# Altium PCB CSI2-TX2-XAVIER_Rev02.PcbDoc (part 2 of 2)
Units mm, origin at the board's own origin, x right, y up, seen from the top; angles counter-clockwise.
Board outline 75 x 25 mm, 4 copper layers (Layer1 Top, Layer2, Layer3, Layer4 Bottom), stack 1.62 mm thick; 77 components, 97 nets, 354 pads, 134 vias.
Unrouted connection lines stored in the file: 59.
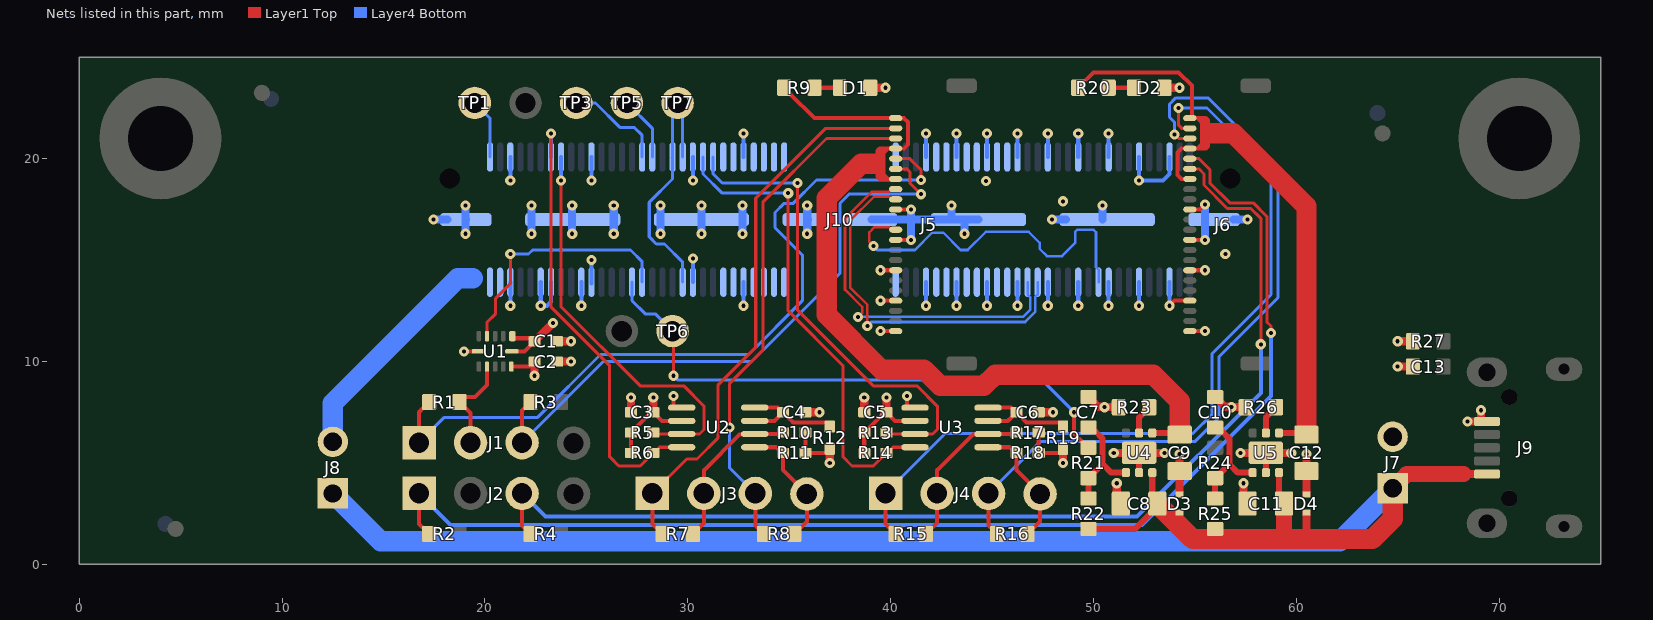
[diagram p4: the nets of this part, all layers, seen from the top]

## Via types
v1: diameter 0.5, hole 0.2, Layer1 Top to Layer4 Bottom, 134 vias

## Nets (pads, with @x,y where several pads share a name; then routed paths per layer and width w, separated by ;. In a path a pad name is that pad's centre, name@x,y a point inside that pad or via, vN(x,y) a via of type N, cw(c..) or ccw(c..) an arc to the next point about the centre after c; other vN are vias at no path point) (continued)
CSI3_D0_P: J5.12 J10.20 | length 18.4
  Layer1 Top w0.125: v1(39.15,15.7) 38.95,15.9 38.95,16.375 39.2,16.625 39.914,16.625 40.039,16.5 J5.12@40.25,16.5
  Layer4 Bottom w0.125: v1(39.15,15.7) 39.35,15.5 41.196,15.5 42.046,16.35 42.604,16.35 43.454,15.5 43.796,15.5 44.696,16.4 46.8,16.4 47.354,15.846 47.354,15.55 47.704,15.2 48.45,15.2 49.1,15.85 49.1,16.4 49.192,16.492 50.008,16.492 50.125,16.375 50.125,14.65 50.25,14.525 J10.20@50.25,13.914
CSI3_D1_N: J5.8 J10.34 | length 18.4
  Layer1 Top w0.125: v1(38.4,12.2) 38.6,12.4 38.6,12.696 37.75,13.546 37.75,17.054 39.071,18.375 39.914,18.375 40.039,18.5 J5.8@40.25,18.5
  Layer4 Bottom w0.125: v1(38.4,12.2) 46.525,12.2 46.875,12.55 46.875,13.178 46.75,13.303 J10.34@46.75,13.914
CSI3_D1_P: J5.9 J10.32 | length 18.4
  Layer1 Top w0.125: v1(38.85,11.75) 38.85,12.8 38,13.65 38,16.95 39.175,18.125 39.914,18.125 40.039,18 J5.9@40.25,18
  Layer4 Bottom w0.125: v1(38.85,11.75) 39.05,11.95 46.629,11.95 47.125,12.446 47.125,13.178 47.25,13.303 J10.32@47.25,13.914
CSI4_CLK_N: J10.45
CSI4_CLK_P: J10.43
CSI4_D0_N: J10.39
CSI4_D0_P: J10.37
CSI4_D1_N: J10.51
CSI4_D1_P: J10.49
CSI5_CLK_N: J10.67
CSI5_CLK_P: J10.65
CSI5_D0_N: J10.61
CSI5_D0_P: J10.59
CSI5_D1_N: J10.73
CSI5_D1_P: J10.71
CSI6_CLK_N: J10.46
CSI6_CLK_P: J10.44
CSI6_D0_N: J10.40
CSI6_D0_P: J10.38
CSI6_D1_N: J10.52
CSI6_D1_P: J10.50
CSI7_CLK_N: J10.68
CSI7_CLK_P: J10.66
CSI7_D0_N: J10.62
CSI7_D0_P: J10.60
CSI7_D1_N: J10.74
CSI7_D1_P: J10.72
EXT-GPIO0-I2C-SCL-A: J4.1 J6.2 R15.1 | length 40.4
  Layer1 Top w0.15: v1(54.2,22.5) 54.2,21.65 54.35,21.5 J6.2@54.75,21.5
  Layer1 Top w0.2: J4.1@39.75,3.5 39.75,2 39.95,1.8 40,1.8 40.25,1.55 R15.1@40.25,1.5
  Layer4 Bottom w0.15: J4.1@39.75,3.5 42.7,6.45 54.9,6.45 55.85,7.4 55.85,10.4 58.75,13.3 58.75,19.35 55.6,22.5 v1(54.2,22.5)
EXT-GPIO0-I2C-SCL-B: J3.1 J5.2 R7.1 | length 27.1
  Layer1 Top w0.15: J3.1@28.25,3.5 29.95,5.2 30.45,5.2 31.5,6.25 31.5,8.85 33.35,10.7 33.35,18.05 36.8,21.5 J5.2@40.25,21.5
  Layer1 Top w0.2: J3.1@28.25,3.5 28.25,2 R7.1@28.45,1.8
EXT-GPIO1-I2C-SDA-A: J4.3 J6.3 R16.1 | length 38
  Layer1 Top w0.15: v1(54,21.2) 54.2,21 J6.3@54.75,21
  Layer1 Top w0.2: J4.3@44.83,3.5 44.83,1.92 44.95,1.8 45,1.8 45.25,1.55 R16.1@45.25,1.5
  Layer4 Bottom w0.15: J4.3@44.83,3.5 47.38,6.05 55,6.05 56.2,7.25 56.2,10.25 59.1,13.15 59.1,19.55 55.65,23 54.062,23 53.75,22.688 53.75,22.05 54,21.8 v1(54,21.2)
EXT-GPIO1-I2C-SDA-B: J3.3 J5.3 R8.1 | length 25.7
  Layer1 Top w0.15: v1(32.05,6.75) 32.05,8.9 33.7,10.55 33.7,17.861 36.839,21 J5.3@40.25,21 J5.3@40.3,21
  Layer1 Top w0.2: J3.3@33.33,3.5 33.33,1.92 33.45,1.8 33.5,1.8 33.75,1.55 R8.1@33.75,1.5
  Layer4 Bottom w0.15: v1(32.05,6.75) 32.05,4.78 J3.3@33.33,3.5
EXT-GPIO2-A: J2.1 J6.5 R2.1 | length 61.8
  Layer1 Top w0.15: J6.5@54.75,20 55.2,20 55.75,19.45 55.75,18.789 56.714,17.825 57.875,17.825 58.55,17.15 58.55,11.95 58.75,11.75 v1(58.75,11.4)
  Layer1 Top w0.2: J2.1@16.75,3.5 16.75,2 16.95,1.8 17,1.8 17.25,1.55 R2.1@17.25,1.5
  Layer4 Bottom w0.2: J2.1@16.75,3.5 18.3,1.95 52.4,1.95 58.75,8.3 v1(58.75,11.4)
EXT-GPIO2-B: J1.1 J5.5 R1.1 | length 38.8
  Layer1 Top w0.15: J5.5@40.25,20 40.95,20 41.5,19.45 v1(41.5,18.95)
  Layer1 Top w0.2: J1.1@16.75,6 16.75,7.5 16.95,7.7 17,7.7 17.25,7.95 R1.1@17.25,8
  Layer4 Bottom w0.15: J1.1@16.75,6 18,7.25 22.6,7.25 25.7,10.35 33,10.35 35.65,13 35.65,15.25 34.3,16.6 34.3,17.35 34.75,17.8 35.2,17.8 36.35,18.95 v1(41.5,18.95)
EXT-GPIO3-A: J2.3 J6.6 R4.1 | length 55.1
  Layer1 Top w0.15: J6.6@54.75,19.5 55.2,19.5 55.45,19.25 55.45,18.7 56.6,17.55 57.761,17.55 58.25,17.061 v1(58.25,10.85)
  Layer1 Top w0.2: J2.3@21.83,3.5 21.83,1.92 21.95,1.8 22,1.8 22.25,1.55 R4.1@22.25,1.5
  Layer4 Bottom w0.2: J2.3@21.83,3.5 22.98,2.35 52.15,2.35 58.25,8.45 v1(58.25,10.85)
EXT-GPIO3-B: J1.3 J5.6 R3.1 | length 31.1
  Layer1 Top w0.15: J5.6@40.25,19.5 40.8,19.5 40.95,19.35 40.95,18.8 v1(41.5,18.25)
  Layer1 Top w0.2: J1.3@21.83,6 21.83,7.58 21.95,7.7 22,7.7 22.25,7.95 R3.1@22.25,8
  Layer4 Bottom w0.15: J1.3@21.83,6 25.83,10 33.15,10 37.5,14.35 37.5,17.8 37.95,18.25 v1(41.5,18.25)
GND: C1.2 C2.2 C3.2 C4.2 C5.2 C6.2 C7.2 C8.2 C9.2 C10.2 C11.2 C12.2 C13.1 D1.K D2.K D3.A D4.A J5.10 J5.13 J5.16 J5.19 J5.22 J6.10 J6.13 J6.16 J6.19 J6.22 J7.2 J9.5 J10.5 J10.6 J10.11 J10.12 J10.17 J10.18 J10.23 J10.24 J10.29 J10.30 J10.35 J10.36 J10.41 J10.42 J10.47 J10.48 J10.53 J10.54 J10.69 J10.70 J10.79 J10.80 J10.99 J10.100 J10.115 J10.116 J10.121 J10.122 J10.123 J10.124 J10.125 J10.126 J10.127 J10.128 R23.1 R26.1 R27.2 U1.6 U2.1 U3.1 U4.5 U4.7 U5.5 U5.7 | length 87.6
  Layer1 Top w0.2: v1(18.975,10.5) U1.6@19.675,10.5 ; U2.1@29.3,7.75 v1(29.3,8.3) ; v1(39.5,11.5) J5.22@40.25,11.5 ; v1(39.5,13) J5.19@40.25,13 ; v1(39.5,14.5) J5.16@40.25,14.5 ; J5.13@40.25,16 v1(41,16) ; J5.10@40.25,17.5 v1(41,17.5) ; U3.1@40.8,7.75 v1(40.8,8.3) ; v1(53.75,12.75) 54,13 J6.19@54.75,13 ; J6.22@54.75,11.5 v1(55.5,11.5) ; J6.16@54.75,14.5 v1(55.5,14.5) ; J6.13@54.75,16 v1(55.5,16) ; J6.10@54.75,17.5 55.25,17.5 v1(55.5,17.75)
  Layer1 Top w0.3: U4.5@52.25,4.525 U4.7@52.25,5.5 ; U5.5@58.5,4.525 U5.7@58.5,5.5
  Layer1 Top w0.4: C2.2@23.55,10 v1(24.25,10) ; C1.2@23.55,11 v1(24.25,11) ; C3.2@27.2,7.525 v1(27.2,8.225) ; C4.2@35.75,7.5 C4.2@35.8,7.5 v1(36.5,7.5) ; C5.2@38.7,7.5 C5.2@38.75,7.5 ; C5.2@38.7,7.525 v1(38.7,8.225) ; D1.K@39,23.5 v1(39.75,23.5) ; C6.2@47.25,7.5 C6.2@47.3,7.5 v1(48,7.5) ; C7.2@49.75,8.25 49.8,8.25 49.95,8.1 49.95,8.05 50.231,7.769 50.531,7.769 v1(50.55,7.75) R23.1@51.25,7.75 R23.1@51.3,7.75 ; v1(51,5.5) U4.7@51.75,5.5 ; C8.2@51.15,3.25 v1(51.15,4) ; U4.7@52.75,5.5 v1(53.5,5.5) ; D2.K@53.5,23.5 v1(54.25,23.5) ; D3.A@54.25,3.5 C9.2@54.25,4.6 ; C9.2@54.25,4.7 v1(54.25,5.45) ; C10.2@56,8.25 56.05,8.25 56.2,8.1 56.2,8.05 56.481,7.769 56.781,7.769 v1(56.8,7.75) R26.1@57.5,7.75 R26.1@57.55,7.75 ; v1(57.25,5.5) U5.7@58,5.5 ; C11.2@57.4,3.25 v1(57.4,4) ; U5.7@59,5.5 v1(59.75,5.5) ; D4.A@60.5,3.5 C12.2@60.5,4.6 ; C12.2@60.5,4.7 v1(60.5,5.45) ; v1(65,9.75) C13.1@65.75,9.75 ; v1(65,11) R27.2@65.75,11 ; v1(68.45,7.05) 69.1,7.05 v1(69.1,7.6)
  Layer4 Bottom w0.2: v1(21.25,12.75) J10.116@21.25,13.914 ; v1(21.25,18.922) J10.115@21.25,20.086 ; J10.100@25.25,13.85 v1(25.25,15.014) ; v1(25.25,18.922) J10.99@25.25,20.086 ; J10.80@30.25,13.914 v1(30.25,15.078) ; v1(30.25,18.922) J10.79@30.25,20.086 ; v1(32.75,12.75) J10.70@32.75,13.914 ; J10.69@32.75,20.086 v1(32.75,21.25) ; v1(41.75,12.75) J10.54@41.75,13.914 ; J10.53@41.75,20.086 v1(41.75,21.25) ; v1(43.25,12.75) J10.48@43.25,13.914 ; J10.47@43.25,20.086 v1(43.25,21.25) ; v1(44.75,12.75) J10.42@44.75,13.914 ; J10.41@44.75,20.086 v1(44.75,21.25) ; v1(46.25,12.75) J10.36@46.25,13.914 ; J10.35@46.25,20.086 v1(46.25,21.25) ; v1(47.75,12.75) J10.30@47.75,13.914 ; J10.29@47.75,20.086 v1(47.75,21.25) ; v1(49.25,12.75) J10.24@49.25,13.914 ; J10.23@49.25,20.086 v1(49.25,21.25) ; v1(50.75,12.75) J10.18@50.75,13.914 ; J10.17@50.75,20.086 v1(50.75,21.25) ; v1(52.25,12.75) J10.12@52.25,13.914 ; J10.11@52.25,20.086 v1(52.25,18.922) 53.422,18.922 53.75,19.25 J10.5@53.75,20.086 ; v1(53.75,12.75) J10.6@53.75,13.914
  Layer4 Bottom w0.4: v1(17.455,17) J10.128@18.155,17 ; v1(19.042,16.3) J10.128@19.042,17 ; v1(19.042,17.7) J10.128@19.042,17 ; J10.128@19.067,17 J10.128@19.042,17 ; v1(22.3,16.3) v1(22.3,17.7) ; v1(24.3,16.3) v1(24.3,17.7) ; v1(26.35,16.3) v1(26.35,17.7) ; v1(28.65,16.3) v1(28.65,17.7) ; v1(30.675,16.3) J10.126@30.675,17 v1(30.675,17.7) ; v1(32.7,16.3) v1(32.7,17.7) ; v1(35.887,16.3) J10.125@35.887,17 ; v1(35.887,17.7) J10.125@35.887,17 ; J10.125@35.912,17 J10.125@35.887,17 ; J10.124@39.055,17 41,17 ; v1(41,16) 41,17 ; v1(41,17.5) 41,17 ; J10.123@43,17 v1(43,17.7) ; v1(43.65,16.3) J10.123@43.65,17 ; J10.123@44.325,17 41,17 ; v1(47.95,17) J10.122@48.65,17 ; J10.122@50.45,17 v1(50.45,17.7) ; v1(55.5,16) v1(55.5,17.75) ; J10.121@56.9,17 v1(57.6,17)
  other v1: 56.5,15.3 48.5,17.9 44.7,18.9
GPIO15_CAM1_PWDN: J10.90 U1.4 | length 12.4
  Layer1 Top w0.15: U1.4@20.1,11.25 20.1,11.939 20.525,12.364 20.525,13.114 21.25,13.839 v1(21.25,15.3)
  Layer4 Bottom w0.15: v1(21.25,15.3) 22.15,15.3 22.35,15.5 27.175,15.5 27.75,14.925 J10.90@27.75,13.914
GPIO15_CAM1_PWDN_3V3: J1.2 R1.2 U1.8 | length 4.9
  Layer1 Top w0.2: J1.2@19.29,6 19.29,7.46 19.05,7.7 19,7.7 18.75,7.95 R1.2@18.75,8 19,8.25 19.5,8.25 20.1,8.85 U1.8@20.1,9.75
GPIO16_CAM1_RST: J10.92 R21.1 TP6.1 | length 28.3
  Layer1 Top w0.15: v1(29.3,9.3) TP6.1@29.3,11.5
  Layer1 Top w0.2: v1(49.05,7.5) 49.05,6.423 49.45,6.023 49.45,6 49.7,5.75 R21.1@49.75,5.75
  Layer4 Bottom w0.15: J10.92@27.25,13.914 27.25,13 27.9,12.35 28.4,12.35 TP6.1@29.25,11.5 ; v1(29.3,9.3) 29.5,9.1 47.45,9.1 v1(49.05,7.5)
GPIO25_VDD_SYS_EN: J10.119 TP1.1 | length 3
  Layer4 Bottom w0.15: TP1.1@19.5,22.75 20.25,22 20.25,21.35 J10.119@20.25,20.086
I2C_CAM_CLK: J4.2 R15.2 R17.1 U3.6 | length 8.1
  Layer1 Top w0.2: R15.2@41.75,1.5 41.75,1.55 42,1.8 42.05,1.8 42.29,2.04 J4.2@42.29,3.5 42.29,4.64 44.057,6.407 44.782,6.407 U3.6@44.8,6.425 46.125,6.425 R17.1@46.2,6.5
I2C_CAM_CLK_1V8: J10.75 R13.2 U3.3 | length 24.1
  Layer1 Top w0.15: v1(35.4,18.8) 35.4,12.55 39.15,8.8 41.3,8.8 42.3,7.8 42.3,6.65 42.075,6.425 U3.3@41.2,6.425 39.875,6.425 R13.2@39.8,6.5
  Layer4 Bottom w0.15: J10.75@31.25,20.086 31.25,19.25 31.7,18.8 v1(35.4,18.8)
I2C_CAM_DAT: J4.4 R16.2 R18.1 U3.5 | length 6.3
  Layer1 Top w0.2: U3.5@44.8,5.775 45.883,5.775 46,5.658 46,5.65 46.15,5.5 R18.1@46.2,5.5 46.2,4.645 J4.4@47.37,3.475 47.37,2.12 47.05,1.8 47,1.8 46.75,1.55 R16.2@46.75,1.5
I2C_CAM_DAT_1V8: J10.77 R14.2 U3.4 | length 23.7
  Layer1 Top w0.15: v1(34.95,18.3) 34.95,12.5 37.65,9.8 37.65,5.3 38.1,4.85 39.15,4.85 39.575,5.275 39.575,5.325 39.75,5.5 R14.2@39.8,5.5 39.85,5.5 40.025,5.675 40.025,5.687 40.113,5.775 U3.4@41.2,5.775
  Layer4 Bottom w0.15: J10.77@30.75,20.086 30.75,19.25 31.7,18.3 v1(34.95,18.3)
I2C_GP0_CLK: J3.2 R7.2 R10.1 U2.6 | length 7.9
  Layer1 Top w0.2: R7.2@30.25,1.5 30.25,1.55 30.5,1.8 30.55,1.8 30.79,2.04 J3.2@30.79,3.5 30.79,4.64 32.557,6.407 U2.6@33.282,6.407 ; U2.6@33.3,6.425 R10.1@34.625,6.425
I2C_GP0_CLK_1V8: J10.105 R5.2 U2.3 | length 20.1
  Layer1 Top w0.15: v1(23.75,18.922) 23.75,12.7 27.65,8.8 29.8,8.8 30.8,7.8 30.8,6.65 30.575,6.425 U2.3@29.7,6.425 R5.2@28.375,6.425
  Layer4 Bottom w0.2: v1(23.75,18.922) J10.105@23.75,20.086
I2C_GP0_DAT: J3.4 R8.2 R11.1 U2.5 | length 6.2
  Layer1 Top w0.2: U2.5@33.3,5.775 34.375,5.775 34.5,5.65 R11.1@34.65,5.5 ; R11.1@34.7,5.5 34.7,4.645 J3.4@35.87,3.475 35.87,2.12 35.55,1.8 35.5,1.8 35.25,1.55 R8.2@35.25,1.5
I2C_GP0_DAT_1V8: J10.107 R6.2 U2.4 | length 22.5
  Layer1 Top w0.15: v1(23.25,21.25) 23.25,12.7 26.15,9.8 26.15,5.3 26.6,4.85 27.65,4.85 28.075,5.275 28.075,5.325 28.25,5.5 R6.2@28.3,5.5 28.35,5.5 28.525,5.675 28.525,5.687 28.613,5.775 U2.4@29.7,5.775
  Layer4 Bottom w0.2: J10.107@23.25,20.086 v1(23.25,21.25)
I2C_PM_CLK_1V8: J10.87 TP5.1 | length 3.2
  Layer4 Bottom w0.15: TP5.1@27,22.75 28.25,21.5 J10.87@28.25,20.086
I2C_PM_DAT_1V8: J10.89 TP3.1 | length 5
  Layer4 Bottom w0.15: TP3.1@24.5,22.75 25.45,22.75 26.65,21.55 27.35,21.55 27.75,21.15 J10.89@27.75,20.086
NetC4_1: C4.1 R12.1 U2.7 U2.8 | length 5.7
  Layer1 Top w0.2: U2.7@33.3,7.075 34.275,7.075 34.5,7.3 34.5,7.35 C4.1@34.65,7.5 ; U2.8@33.3,7.725 34.425,7.725 C4.1@34.65,7.5 ; R12.1@37,6.8 37,6.85 36.85,7 35.2,7 34.9,7.3 34.9,7.35 34.75,7.5 C4.1@34.7,7.5 C4.1@34.65,7.5
NetC6_1: C6.1 R19.1 U3.7 U3.8 | length 5.7
  Layer1 Top w0.2: U3.7@44.8,7.075 45.775,7.075 46,7.3 46,7.35 C6.1@46.15,7.5 ; U3.8@44.8,7.725 45.925,7.725 C6.1@46.15,7.5 ; R19.1@48.5,6.8 48.5,6.85 48.35,7 46.7,7 46.4,7.3 46.4,7.35 46.25,7.5 C6.1@46.2,7.5 C6.1@46.15,7.5
NetC7_1: C7.1 R21.2 R22.1 U4.4 | length 5.5
  Layer1 Top w0.3: R22.1@49.75,3.25 R21.2@49.75,4.25 49.8,4.25 50,4.45 50,4.5 50.45,4.95 ; C7.1@49.75,6.75 49.95,6.55 50.1,6.55 50.45,6.2 50.45,4.95 ; U4.4@51.6,4.525 50.875,4.525 50.45,4.95
NetC10_1: C10.1 R24.2 R25.1 U5.4 | length 5.5
  Layer1 Top w0.3: R25.1@56,3.25 R24.2@56,4.25 56.05,4.25 56.25,4.45 56.25,4.5 56.7,4.95 ; C10.1@56,6.75 56.2,6.55 56.35,6.55 56.7,6.2 56.7,4.95 ; U5.4@57.85,4.525 57.125,4.525 56.7,4.95
NetD1_A: D1.A R9.2 | length 1.3
  Layer1 Top w0.2: R9.2@36.25,23.5 D1.A@37.5,23.5
NetD2_A: D2.A R20.2 | length 1.3
  Layer1 Top w0.2: R20.2@50.75,23.5 D2.A@52,23.5
NetR23_2: R23.2 U4.2 | length 1.5
  Layer1 Top w0.3: U4.2@52.25,6.475 52.25,7.25 52.5,7.5 52.55,7.5 52.75,7.7 R23.2@52.75,7.75
NetR26_2: R26.2 U5.2 | length 1.5
  Layer1 Top w0.3: U5.2@58.5,6.475 58.5,7.25 58.75,7.5 58.8,7.5 59,7.7 R26.2@59,7.75
VCC1V8: C1.1 C3.1 C5.1 J10.102 R5.1 R6.1 R13.1 R14.1 U1.1 U1.12 U2.2 U3.2 | length 14.7
  Layer1 Top w0.2: U1.12@21.325,10.5 21.95,10.5 22.25,10.8 22.25,10.85 22.4,11 C1.1@22.45,11 22.3,11.15 21.41,11.15 21.35,11.21 U1.1@21.35,11.25 ; R6.1@27.2,5.5 R5.1@27.2,6.5 27.25,6.5 27.4,6.65 27.4,6.7 28.05,7.35 28.1,7.35 C3.1@28.25,7.5 ; C3.1@28.35,7.5 28.5,7.35 28.5,7.3 28.725,7.075 U2.2@29.7,7.075 ; R14.1@38.7,5.5 R13.1@38.7,6.5 38.75,6.5 38.9,6.65 38.9,6.7 39.55,7.35 39.6,7.35 C5.1@39.75,7.5 ; C5.1@39.8,7.5 39.85,7.5 40,7.35 40,7.3 40.225,7.075 U3.2@41.2,7.075
  Layer1 Top w0.4: C1.1@22.45,11 v1(23.35,11.9) ; C3.1@28.3,7.525 v1(28.3,8.225) ; C5.1@39.8,7.525 v1(39.8,8.225)
  Layer1 Top w0.5: C3.1@28.25,7.5 C3.1@28.3,7.5 ; C5.1@39.75,7.5 C5.1@39.8,7.5
  Layer4 Bottom w0.2: v1(24.75,12.75) J10.102@24.75,13.914
VCC2V8: J10.81 J10.82 J10.83 TP7.1 | length 13.1
  Layer4 Bottom w0.15: J10.83@29.22,20.056 J10.83@29.25,20.086 ; J10.82@29.75,13.914 29.75,14.9 28.85,15.8 28.45,15.8 28.1,16.15 28.1,17.85 29.25,19 J10.83@29.25,20.086 ; J10.81@29.75,20.086 29.75,22.5 TP7.1@29.5,22.75 29.25,22.5 J10.83@29.25,20.086
VCC3V3: C2.1 J10.108 J10.110 R10.2 R11.2 R12.2 R17.2 R18.2 R19.2 U1.11 | length 10.6
  Layer1 Top w0.2: U1.11@21.3,9.75 22.4,9.75 22.45,9.7 ; R10.2@35.8,6.5 R11.2@35.8,5.5 36.8,5.5 36.85,5.5 37,5.65 R12.2@37,5.7 ; R17.2@47.3,6.5 R18.2@47.3,5.5 48.3,5.5 48.35,5.5 48.5,5.65 R19.2@48.5,5.7
  Layer1 Top w0.4: v1(22.45,9.3) 22.45,9.7 C2.1@22.45,10 ; v1(37,5) R12.2@37,5.65 ; R12.2@37,5.7 R12.2@37,5.75 ; v1(48.5,5) R19.2@48.5,5.65 ; R19.2@48.5,5.7 R19.2@48.5,5.75
  Layer4 Bottom w0.2: J10.110@22.75,13.914 v1(22.75,12.75) 23.05,12.75 23.25,12.95 J10.108@23.25,13.914
VCC-EXT-IN: C8.1 C11.1 D3.K D4.K J7.1 J8.1 J9.1 R22.2 R25.2 U4.6 U5.6 | length 82.8
  Layer1 Top w0.3: R22.2@49.75,1.75 52.05,1.75 52.85,2.55 53.15,2.85 C8.1@53.15,3 ; C8.1@52.9,3.35 U4.6@52.9,4.525 ; C11.1@59.15,3.35 U5.6@59.15,4.525
  Layer1 Top w0.4: 60.5,1.25 D4.K@60.5,2.5 ; 68.25,4.45 J9.1@69.4,4.45
  Layer1 Top w0.8: 59.35,1.25 59.4,1.3 C11.1@59.4,3 ; J7.1@64.75,3.75 65.45,4.45 68.25,4.45
  Layer1 Top w1: C8.1@53.2,2.9 53.25,2.9 54.9,1.25 59.35,1.25 60.5,1.25 63.746,1.25 64.75,2.254 J7.1@64.75,3.75
  Layer4 Bottom w1: J8.1@12.5,3.5 14.863,1.138 62.138,1.138 J7.1@64.75,3.75
VCC-EXT-IN-A: C12.1 J6.1 J6.4 J6.7 R20.1 U5.1 | length 32.1
  Layer1 Top w0.2: R20.1@49.25,23.5 50,24.25 54.2,24.25 54.85,23.6 54.85,22.1 J6.1@54.75,22 55.125,22 ; J6.7@54.75,19 54.744,19.006 54.344,19.006 54.15,19.2 54.15,20.3 54.35,20.5 J6.4@54.75,20.5 55.125,20.5 ; 55.475,20.85 55.125,20.5 ; 55.475,21.65 55.125,22 ; 55.5,20.5 55.125,20.5 ; 55.5,22 55.125,22
  Layer1 Top w0.3: U5.1@59.15,6.475 C12.1@59.95,6.475
  Layer1 Top w0.5: 55.5,20.65 55.5,21.85
  Layer1 Top w1: 55.75,21.25 56.9,21.25 60.5,17.65 C12.1@60.5,6.55
VCC-EXT-IN-B: C9.1 J5.1 J5.4 J5.7 R9.1 U4.1 | length 42.5
  Layer1 Top w0.2: R9.1@35.05,23.2 36.25,22 J5.1@40.05,22 ; 39.5,19 39.875,19 ; 39.5,20.5 39.875,20.5 ; 39.525,19.35 39.875,19 ; 39.525,20.15 39.875,20.5 ; J5.7@40.25,19 39.875,19 ; J5.1@40.25,22 40.256,21.994 40.656,21.994 40.85,21.8 40.85,20.7 40.65,20.5 J5.4@40.25,20.5 39.875,20.5
  Layer1 Top w0.3: U4.1@52.9,6.475 C9.1@53.7,6.475
  Layer1 Top w0.5: 39.5,19.15 39.5,20.35
  Layer1 Top w1: 39.25,19.75 38.55,19.75 36.85,18.05 36.85,12.3 39.55,9.6 41.65,9.6 42.45,8.8 44.6,8.8 45.15,9.35 52.95,9.35 54.25,8.05 C9.1@54.25,6.45
XA-VCC3V3_TX2-VCC5V: J8.2 J10.118 J10.120 | length 11.4
  Layer4 Bottom w1: J8.2@12.5,6.04 12.5,7.95 18.65,14.1 19.4,14.1
XA_GND1: J10.63
XA_GND2: J10.64
pads on no net: J5.23 J5.24 J6.23 J6.24 J9. J9.2 J9.3 J9.4 J10.55 J10.56 J10.57 J10.58 J10.76 J10.78 J10.84 J10.85 J10.86 J10.96 J10.97 J10.98 J10.101 J10.103 J10.104 J10.106 J10.109 J10.111 J10.112 J10.113 J10.114 J10.117 J10.129 J10.130 MRK1.1 MRK2.1 MRK3.1 MRK4.1 MRK5.1 MRK6.1 U4.3 U5.3 X1.1
copper on no net: | length 4
  Layer1 Top w0.2: 66.745,3.006 67.745,3.006 ; 66.755,6.25 67.755,6.25 ; 67.245,2.506 67.245,3.506 ; 67.255,6.25 67.255,7.25

## Polygon pours and split planes (outlines as drawn)
C-GND on Layer3 "C-GND_L03_P004" (hatched 45Degree grid 0.1 track 0.1, remove dead copper, pour order 4): 67.75,0.5 67.75,3.5 70,3.5 70,8.25 67.75,8.25 67.75,24.5 74.5,24.5 74.5,0.5
GND on Layer3 "GND_L03_P006" (hatched 45Degree grid 0.1 track 0.1, remove dead copper, pour order 6): 20.5,13.75 33,13.75 33,10 40.25,10 40.25,8 48.75,8 48.75,4 20.5,4 20.5,0 21,0.5 67.25,0.5 67.25,4 69.5,4 69.5,7.75 67.25,7.75 67.25,25 0,25 0,0 20.5,0
VCC3V3 on Layer3 "VCC3V3_L03_P002" (hatched 45Degree grid 0.1 track 0.1, remove dead copper, pour order 2): 23,13.5 20.75,13.5 20.75,4.25 48.5,4.25 48.5,7.75 23,7.75
VCC1V8 on Layer3 "VCC1V8_L03_P000" (hatched 45Degree grid 0.1 track 0.1, remove dead copper, pour order 0): 23.25,13.5 23.25,8 40,8 40,9.75 32.75,9.75 32.75,13.5
C-GND on Layer2 "C-GND_L02_P010" (hatched 45Degree grid 0.1 track 0.1, remove dead copper, pour order 10): 67.75,8.25 70,8.25 70,3.5 67.75,3.5 67.75,0 75,0 75,25 67.75,25
GND on Layer2 "GND_L02_P008" (hatched 45Degree grid 0.1 track 0.1, remove dead copper, pour order 8): 0,0 0,25 67.25,25 67.25,7.75 69.5,7.75 69.5,4 67.25,4 67.25,0

## Keep-outs
Keep-Out Layer:
  lines w0.025: 0.5,4.75 2.038,4.75 2.038,0.5 0.5,0.5 ; 0.5,0.5 74.5,0.5 74.5,24.5 0.5,24.5 0.5,0.5

## Other copper
Layer1 Top:
  text "CamB" at 44.85,22.55 h1
  text "CamA" at 59.35,22.55 h1
  text "J6" at 59.25,20.5 h1
  text "J5" at 44.75,19.5 h1
  text "CSI2-TX2-XAVIER" at 1.1,14.8 h1
  text "Rev. 02" at 1.1,12.8 h1
  text "J9" at 70.5,11 h1
  text "J1" at 14.75,8 h1
  text "PS" at 1.75,6 h0.8 r90
  text "DC IN 5V" at 63.5,2.5 h1 r90
  text "1" at 1.75,1 h0.8 r90
  text "J8 FOR TX2" at 10.5,1 h1 r90
  text "J8" at 11.75,1 h1
  text "J2" at 19.75,1 h1
  text "J3" at 31.25,1 h1
  text "J4" at 42.75,1 h1
  text "J7" at 66.25,1 h1
Layer2:
  text "2" at 1.75,1.75 h0.8 r90
  text "Layer2" at 38,-32 h0.9
Layer3:
  text "3" at 1.75,2.75 h0.8 r90
  text "Layer3" at 38,-32 h0.9
Layer4 Bottom:
  rectangle net XA-VCC3V3_TX2-VCC5V: 19.35,13.9 20.75,14.6
  rectangle net VCC2V8: 29.25,20.95 29.75,22.1
  text "J6" at 38.5,21.25 h1
  text "119" at 18.25,21 h1
  text "1" at 55.5,21 h1
  text "120" at 20.75,11.25 h1
  text "2" at 54,11 h1
  text "SS" at 1.75,6 h0.8 r90
  text "4" at 1.75,3.75 h0.8 r90

## Silkscreen, mask and mechanical layers (free items; w line width, h text height)
Top Overlay:
  lines w0.1: 61.35,1.24 61.35,8.79 68.15,8.79 68.15,1.24 ; 61.35,1.25 68.15,1.25
Top Solder:
  lines w0.25: 66.745,3.006 67.745,3.006 ; 66.755,6.25 67.755,6.25 ; 67.245,2.506 67.245,3.506 ; 67.255,6.25 67.255,7.25
  text "CamB" at 44.85,22.55 h1
  text "CamA" at 59.35,22.55 h1
  text "J6" at 59.25,20.5 h1
  text "J5" at 44.75,19.5 h1
  text "CSI2-TX2-XAVIER" at 1.1,14.8 h1
  text "Rev. 02" at 1.1,12.8 h1
  text "J9" at 70.5,11 h1
  text "J1" at 14.75,8 h1
  text "DC IN 5V" at 63.5,2.5 h1 r90
  text "J8 FOR TX2" at 10.5,1 h1 r90
  text "J8" at 11.75,1 h1
  text "J2" at 19.75,1 h1
  text "J3" at 31.25,1 h1
  text "J4" at 42.75,1 h1
  text "J7" at 66.25,1 h1
Bottom Solder:
  text "J6" at 38.5,21.25 h1
  text "119" at 18.25,21 h1
  text "1" at 55.5,21 h1
  text "120" at 20.75,11.25 h1
  text "2" at 54,11 h1
Mechanical 1:
  the board outline again, w0.025
Mechanical 10:
  drawing of 777 lines, arcs and shapes, not listed
  text ".Designator" at 44.249,35.094 h1
  text ".Designator" at 43.351,16.006 h1
Drill Drawing:
  circle w0.1: c28.137,49.403 r0.278
  lines w0.1: -44,42 -6.25,42 ; -44,43.5 -6.25,43.5 ; -44,45 -6.25,45 ; -44,46.5 -6.25,46.5 ; -44,48 -6.25,48 ; -44,49.5 -6.25,49.5 ; -44,51 -6.25,51 ; -44,52.5 -6.25,52.5 ; -29,38.5 -29,40 ; -29,40.5 -29,54 ; -22,38.5 -22,40 ; -22,40.5 -22,54 ; 27.356,46.25 73.477,46.25 ; 27.356,56.25 73.477,56.25 ; 32,45 32,57.5 ; 37.868,45 37.868,57.5 ; 49.135,45 49.135,57.5 ; 53.404,45 53.404,57.5 ; 59.572,45 59.572,57.5 ; -44,38.5 -44,40 -6.25,40 -6.25,38.5 -44,38.5 ; -44,40.5 -6.25,40.5 -6.25,54 -44,54 -44,40.5 ; -44,54.5 -6.25,54.5 -6.25,56 -44,56 -44,54.5 ; 27.356,45 73.477,45 73.477,57.5 27.356,57.5 27.356,45 ; 27.86,47.875 27.86,48.014 27.998,48.153 27.86,48.292 27.86,48.431 27.998,48.431 28.137,48.292 28.276,48.431 28.415,48.431 28.415,48.292 28.276,48.153 28.415,48.014 28.415,47.875 28.276,47.875 28.137,48.014 27.998,47.875 27.86,47.875 ; 27.86,50.931 28.415,50.931 28.137,50.375 27.86,50.931 ; 27.86,51.764 27.998,51.764 27.998,51.625 28.276,51.625 28.276,51.764 28.415,51.764 28.415,52.042 28.276,52.042 28.276,52.181 27.998,52.181 27.998,52.042 27.86,52.042 27.86,51.764 ; 27.86,53.014 27.998,53.014 28.137,52.875 28.276,53.014 28.415,53.014 28.276,53.153 28.415,53.292 28.276,53.292 28.137,53.431 27.998,53.292 27.86,53.292 27.998,53.153 27.86,53.014 ; 27.86,54.125 28.137,54.264 28.415,54.125 28.276,54.403 28.415,54.681 28.137,54.542 27.86,54.681 27.998,54.403 27.86,54.125 ; 27.86,55.375 28.415,55.375 28.415,55.931 27.86,55.931 27.86,55.375 ; 27.971,53.069 28.054,53.069 28.137,52.986 28.221,53.069 28.304,53.069 28.221,53.153 28.304,53.236 28.221,53.236 28.137,53.319 28.054,53.236 27.971,53.236 28.054,53.153 27.971,53.069
  text "Symbol" at 28.106,56.625 h0.6
  text "Hit Count" at 32.375,56.625 h0.6
  text "Finished Hole Size" at 38.243,56.625 h0.6
  text "Plated" at 49.51,56.625 h0.6
  text "Hole Type" at 53.779,56.625 h0.6
  text "Drill Layer Pair" at 59.947,56.625 h0.6
  text "134" at 32.375,55.375 h0.5
  text "0,200mm (7,87mil)" at 38.243,55.375 h0.5
  text "PTH" at 49.51,55.375 h0.5
  text "Round" at 53.779,55.375 h0.5
  text "Layer1 Top - Layer4 Bottom" at 59.947,55.375 h0.5
  text "Layer Stackup 4  FR4 TG150" at -43,55 h0.8
  text "2" at 32.375,54.125 h0.5
  text "0,550mm (21,65mil)" at 38.243,54.125 h0.5
  text "PTH" at 49.51,54.125 h0.5
  text "Slot" at 53.779,54.125 h0.5
  text "Layer1 Top - Layer4 Bottom" at 59.947,54.125 h0.5
  text "Top Soldermask" at -43,53 h0.8
  text "25 um" at -26.5,53 h0.8
  text "standard" at -21,53 h0.8
  text "2" at 32.375,52.875 h0.5
  text "0,800mm (31,50mil)" at 38.243,52.875 h0.5
  text "NPTH" at 49.51,52.875 h0.5
  text "Round" at 53.779,52.875 h0.5
  text "Layer1 Top - Layer4 Bottom" at 59.947,52.875 h0.5
  text "2" at 32.375,51.625 h0.5
  text "0,850mm (33,47mil)" at 38.243,51.625 h0.5
  text "PTH" at 49.51,51.625 h0.5
  text "Slot" at 53.779,51.625 h0.5
  text "Layer1 Top - Layer4 Bottom" at 59.947,51.625 h0.5
  text "Layer1 Top" at -42.75,51.5 h0.8
  text "35 um" at -26.5,51.5 h0.8
  text "Signal / Zdiff 100R" at -21,51.5 h0.8
  text "L 125um / S 125um / L 125um" at -4.75,51.5 h0.8
  text "4" at 32.375,50.375 h0.5
  text "0,900mm (35,43mil)" at 38.243,50.375 h0.5
  text "PTH" at 49.51,50.375 h0.5
  text "Round" at 53.779,50.375 h0.5
  text "Layer1 Top - Layer4 Bottom" at 59.947,50.375 h0.5
  text "Prepreg 2x1080" at -42.75,50 h0.8
  text "140 um" at -27.25,50 h0.8
  text "2" at 32.375,49.125 h0.5
  text "1,000mm (39,37mil)" at 38.243,49.125 h0.5
  text "NPTH" at 49.51,49.125 h0.5
  text "Round" at 53.779,49.125 h0.5
  text "Layer1 Top - Layer4 Bottom" at 59.947,49.125 h0.5
  text "Layer2" at -42.75,48.5 h0.8
  text "35 um" at -26.5,48.5 h0.8
  text "Plane / Ref." at -21,48.5 h0.8
  text "23" at 32.375,47.875 h0.5
  text "1,000mm (39,37mil)" at 38.243,47.875 h0.5
  text "PTH" at 49.51,47.875 h0.5
  text "Round" at 53.779,47.875 h0.5
  text "Layer1 Top - Layer4 Bottom" at 59.947,47.875 h0.5
  text "Core / Prepreg" at -42.75,47 h0.8
  text "1200 um" at -28,47 h0.8
  text "2" at 32.375,46.625 h0.5
  text "3,200mm (125,98mil)" at 38.243,46.625 h0.5
  text "PTH" at 49.51,46.625 h0.5
  text "Round" at 53.779,46.625 h0.5
  text "Layer1 Top - Layer4 Bottom" at 59.947,46.625 h0.5
  text "F" at 27.852,46.525 h0.56
  text "Layer3" at -42.75,45.5 h0.8
  text "35 um" at -26.5,45.5 h0.8
  text "Plane / Ref." at -21,45.5 h0.8
  text "171 Total" at 32.375,45.375 h0.5
  text "Slot definitions :" at 28.106,44.134 h0.5
  text "Routed Path Length" at 36.758,44.134 h0.5
  text "= Calculated from tool start centre position to tool end centre position." at 45.994,44.134 h0.5
  text "Prepreg 2x1080" at -42.75,44 h0.8
  text "140 um" at -27.25,44 h0.8
  text "Hole Length" at 36.758,43.267 h0.5
  text "= Routed Path Length + Tool Size = Slot length as defined in the PCB layout" at 42.578,43.267 h0.5
  text "Layer4 Bottom" at -42.75,42.5 h0.8
  text "35 um" at -26.5,42.5 h0.8
  text "Signal / Zdiff 100R" at -21,42.5 h0.8
  text "L 125um / S 125um / L 125um" at -4.75,42.5 h0.8
  text "Bottom Soldermask" at -42.75,41 h0.8
  text "25 um" at -26.5,41 h0.8
  text "standard" at -21,41 h0.8
  text "Thickness approx." at -43,39 h0.8
  text "1600 um" at -28,39 h0.8
Mechanical 30:
  text "2" at 114.208,31.369 h2
  text "2" at 177.208,31.369 h2
  text "2" at 111.208,21.437 h2
  text "2" at 178.208,21.437 h2
  text "2" at 144.708,-10.763 h2
Mechanical 32:
  drawing of 20 lines, arcs and shapes, not listed
  text "1" at 114.46,31.632 h0.1
  text "1" at 177.46,31.632 h0.1
  text "1" at 111.46,21.7 h0.1
  text "1" at 178.46,21.7 h0.1
  text "1" at 144.96,-10.5 h0.1

## Dimensions
0,25 to 75,25 on Drill Drawing
75,25 to 75,0 on Drill Drawing

## Text inside footprints (layer, text, board x,y; h text height)
J1: Top Overlay "4" at 24.37,6 h0.5; Top Overlay "1" at 16.75,6 h0.5
J2: Top Overlay "4" at 24.37,3.5 h0.5; Top Overlay "1" at 16.75,3.5 h0.5
J3: Top Overlay "4" at 35.87,3.5 h0.5; Top Overlay "1" at 28.25,3.5 h0.5
J4: Top Overlay "4" at 47.37,3.5 h0.5; Top Overlay "1" at 39.75,3.5 h0.5
J5: Top Overlay "1" at 41.5,21.75 h0.5 r90; Top Overlay "22" at 41.5,11.25 h0.5 r90
J6: Top Overlay "1" at 56,21.75 h0.5 r90; Top Overlay "22" at 56,11.25 h0.5 r90
J7: Top Overlay "1" at 64.5,3.2 h0.5 r270
J8: Top Overlay "1" at 12.25,2.95 h0.5 r270
J10: Bottom Overlay "61" at 35,18.25 h0.5; Bottom Overlay "62" at 35,15.25 h0.5; Bottom Overlay "119" at 20.5,18.25 h0.5; Bottom Overlay "120" at 20.5,15.25 h0.5; Bottom Overlay "1" at 55,18.25 h0.5; Bottom Overlay "2" at 55,15.25 h0.5; Bottom Overlay "59" at 40.5,18.25 h0.5; Bottom Overlay "60" at 40.5,15.25 h0.5
T1: Drill Drawing "All drills (PTH and NPTH) should run in one work process" at -46,-37 h0.8; Mechanical 16 "Project:" at 6,-30 h0.89; Mechanical 16 "Layer Name:" at 38,-30 h0.89; Mechanical 16 "Germany" at 53.25,-25.75 h0.89; Mechanical 16 "Stadtroda" at 40.75,-27.5 h0.89; Mechanical 16 "Taschenweg 2a" at 40.5,-25.75 h0.89; Mechanical 16 "Allied Vision" at 31.25,-25.75 h0.89; Mechanical 16 "Date:" at 6,-34.5 h0.89; Mechanical 16 "Title:" at 6,-25.5 h0.89; Mechanical 16 "PCB Designer:" at 22,-30 h0.89; Mechanical 16 "File Name:" at 22,-34.5 h0.89; Mechanical 16 "Technologies" at 31.25,-27.25 h0.89; Mechanical 16 "Bare Board Number:" at 61,-30 h0.89; Mechanical 16 "Bare Board Revision:" at 61,-25.5 h0.89; Mechanical 16 "2" at -19.75,-38.5 h0.5; Mechanical 16 "3" at 0.25,-38.5 h0.5; Mechanical 16 "4" at 20.25,-38.5 h0.5; Mechanical 16 "5" at 40.25,-38.5 h0.5; Mechanical 16 "6" at 60.25,-38.5 h0.5; Mechanical 16 "7" at 80.25,-38.5 h0.5; Mechanical 16 "1" at -39.75,-38.5 h0.5; Mechanical 16 "1" at -39.75,60.5 h0.5; Mechanical 16 "7" at 80.25,60.5 h0.5; Mechanical 16 "6" at 60.25,60.5 h0.5; Mechanical 16 "5" at 40.25,60.5 h0.5; Mechanical 16 "4" at 20.25,60.5 h0.5; Mechanical 16 "3" at 0.25,60.5 h0.5; Mechanical 16 "2" at -19.75,60.5 h0.5; Mechanical 16 "A" at -49.117,50.95 h0.5; Mechanical 16 "B" at -49.117,30.95 h0.5; Mechanical 16 "C" at -49.117,10.95 h0.5; Mechanical 16 "D" at -49.117,-9.05 h0.5; Mechanical 16 "E" at -49.117,-29.05 h0.5; Mechanical 16 "E" at 89.883,-29.05 h0.5; Mechanical 16 "D" at 89.883,-9.05 h0.5; Mechanical 16 "C" at 89.883,10.95 h0.5; Mechanical 16 "B" at 89.883,30.95 h0.5; Mechanical 16 "A" at 89.883,50.95 h0.5
T2: Mechanical 15 "Bare Board Revision:" at 33.5,-25.5 h0.89; Mechanical 15 "Bare Board Number:" at 33.5,-30 h0.89; Mechanical 15 "Technologies" at 63.25,-27.25 h0.89; Mechanical 15 "File Name:" at 72.5,-34.5 h0.89; Mechanical 15 "PCB Designer:" at 72.5,-30 h0.89; Mechanical 15 "Title:" at 88.5,-25.5 h0.89; Mechanical 15 "Date:" at 88.5,-34.5 h0.89; Mechanical 15 "Allied Vision" at 63.25,-25.75 h0.89; Mechanical 15 "Taschenweg 2a" at 54,-25.75 h0.89; Mechanical 15 "Stadtroda" at 53.75,-27.5 h0.89; Mechanical 15 "Germany" at 41.25,-25.75 h0.89; Mechanical 15 "Layer Name:" at 56.5,-30 h0.89; Mechanical 15 "A" at -48.883,50.95 h0.5; Mechanical 15 "B" at -48.883,30.95 h0.5; Mechanical 15 "C" at -48.883,10.95 h0.5; Mechanical 15 "D" at -48.883,-9.05 h0.5; Mechanical 15 "E" at -48.883,-29.05 h0.5; Mechanical 15 "E" at 90.117,-29.05 h0.5; Mechanical 15 "D" at 90.117,-9.05 h0.5; Mechanical 15 "C" at 90.117,10.95 h0.5; Mechanical 15 "B" at 90.117,30.95 h0.5; Mechanical 15 "A" at 90.117,50.95 h0.5; Mechanical 15 "2" at 60.75,60.5 h0.5; Mechanical 15 "3" at 40.75,60.5 h0.5; Mechanical 15 "4" at 20.75,60.5 h0.5; Mechanical 15 "5" at 0.75,60.5 h0.5; Mechanical 15 "6" at -19.25,60.5 h0.5; Mechanical 15 "7" at -39.25,60.5 h0.5; Mechanical 15 "1" at 80.75,60.5 h0.5; Mechanical 15 "1" at 80.75,-38.5 h0.5; Mechanical 15 "7" at -39.25,-38.5 h0.5; Mechanical 15 "6" at -19.25,-38.5 h0.5; Mechanical 15 "5" at 0.75,-38.5 h0.5; Mechanical 15 "4" at 20.75,-38.5 h0.5; Mechanical 15 "3" at 40.75,-38.5 h0.5; Mechanical 15 "2" at 60.75,-38.5 h0.5; Mechanical 15 "Project:" at 88.5,-30 h0.89